# EAGLE board hexapodu (EAGLE 4.11)
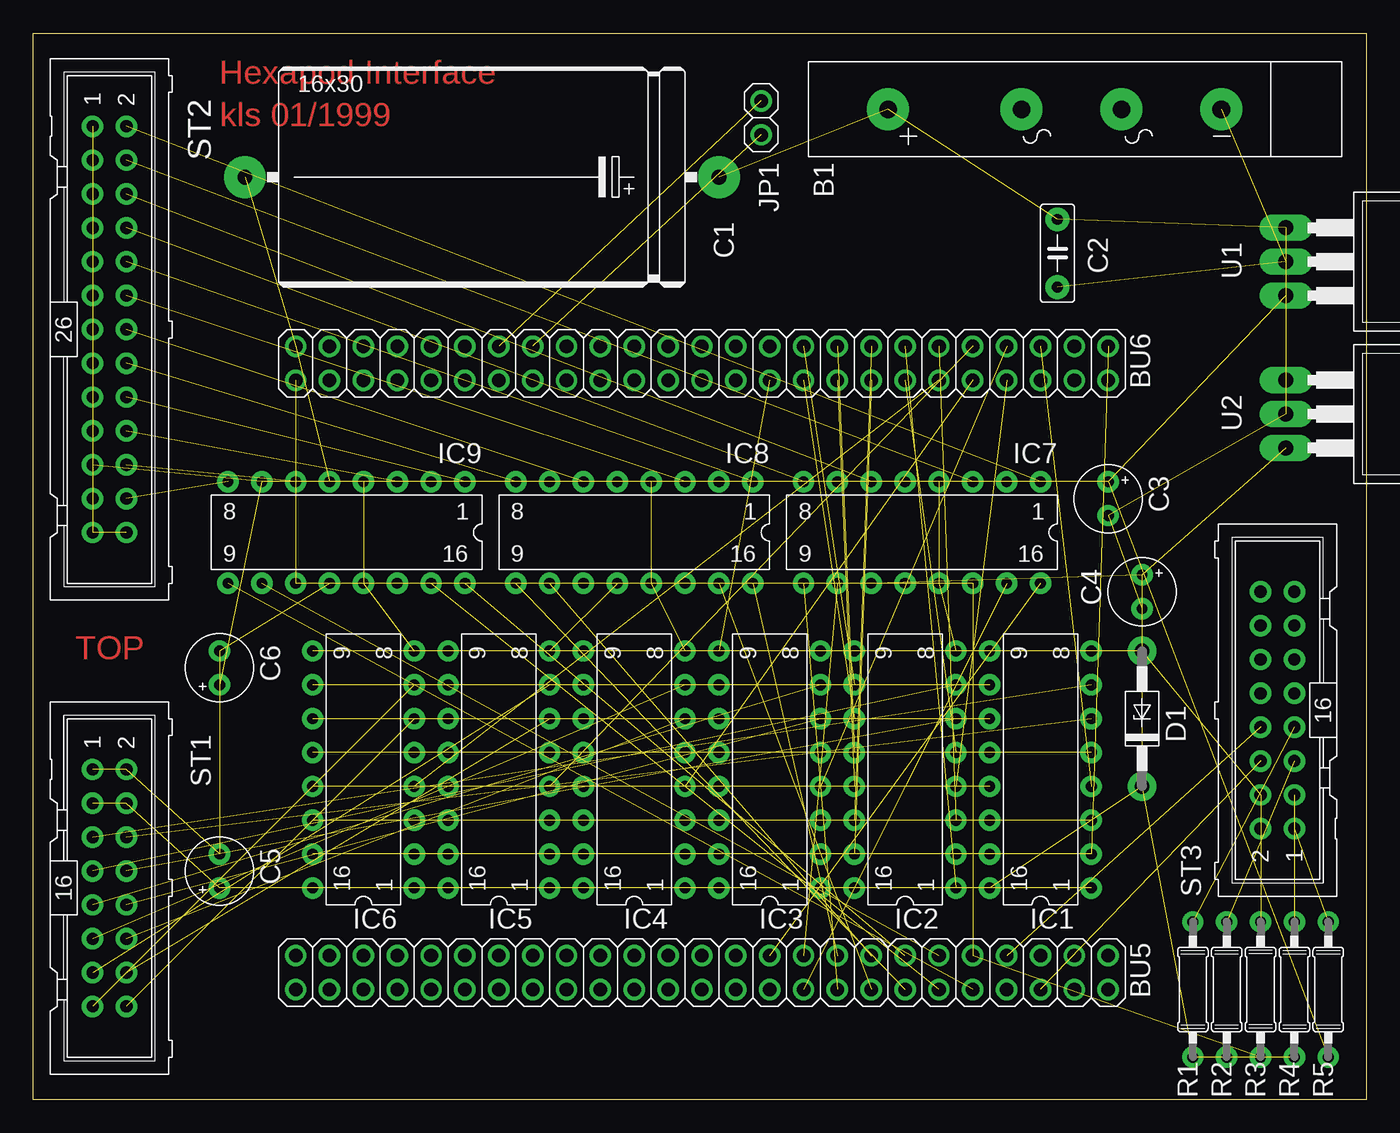
[diagram p0: board, top side]
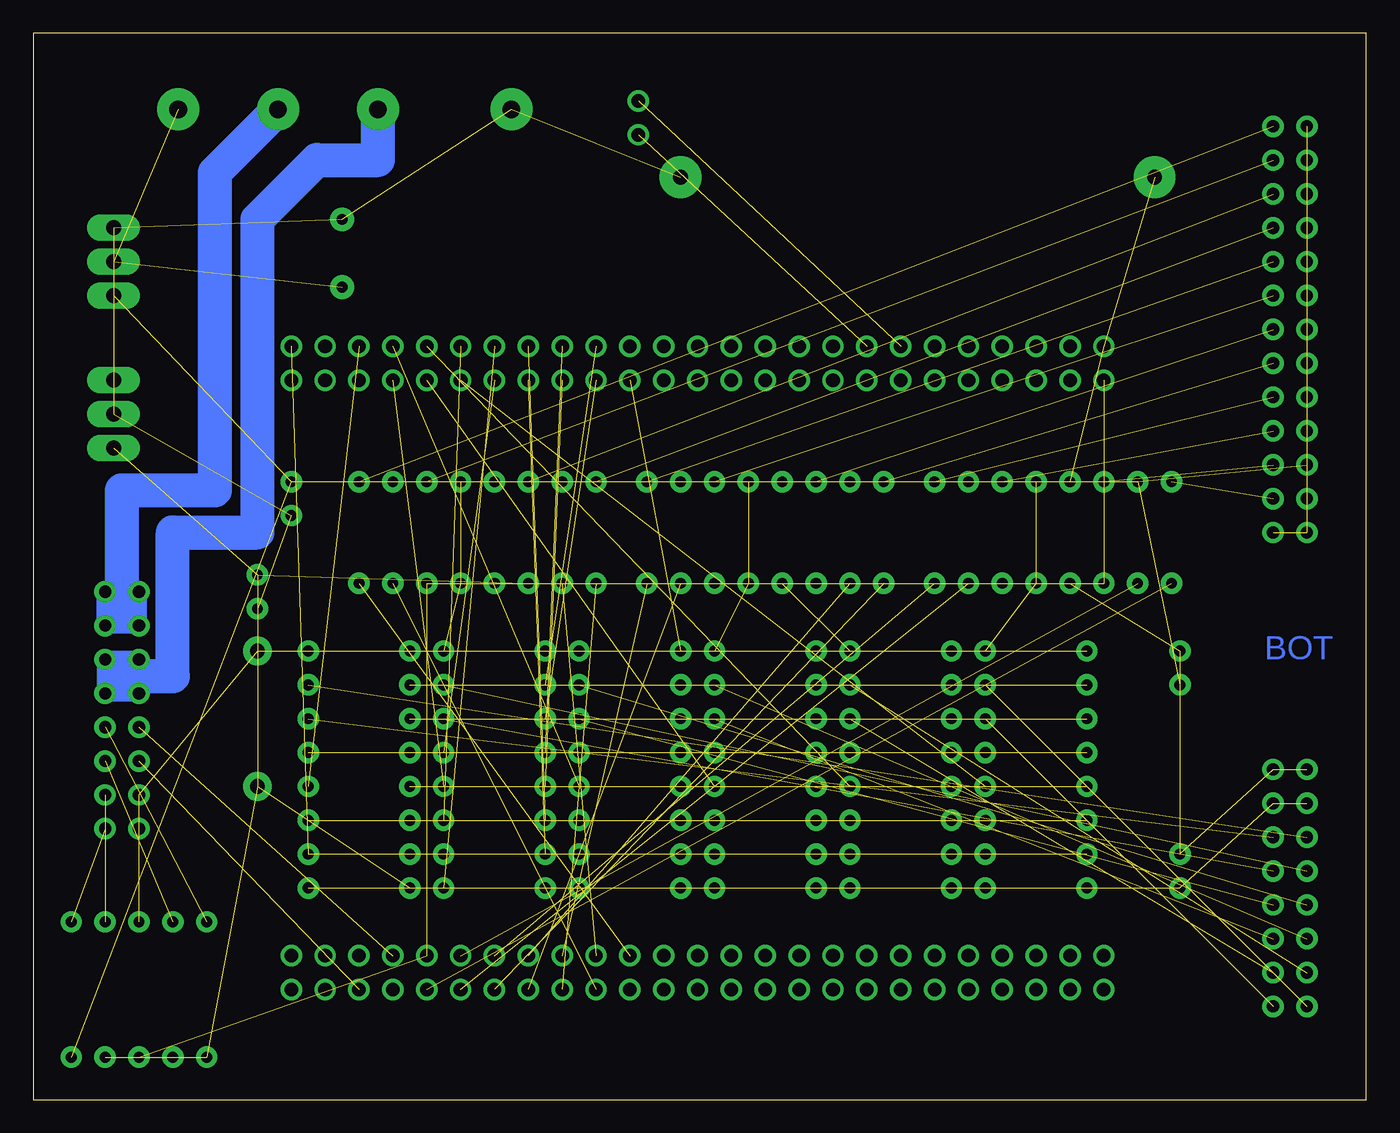
[diagram p1: board, bottom side, seen from below]

Size 100 x 80 mm. Coordinates in mm from the lower left corner, seen from the top.
Outline: 0,0 0,80 100,80 100,0 0,0
Copper layers (1*16): Top 0.035mm / dielectric 1.5mm / Bottom 0.035mm
Design rules "default": minimum track width 10mil, minimum drill 24mil, track to track 8mil, track to pad 8mil, pad to pad 8mil, via to via 8mil, smd to smd 8mil, copper to edge 40mil, drill to drill 8mil, minimum pad ring 10mil, minimum via ring 10mil, stop-mask expansion 0mil, vias tented up to drill 0mil, thermal gap 10mil
Net classes: 1 AC: width 1.27 mm, drill 0.406 mm; 2 Power: width 0.762 mm, drill 0.254 mm, clearance 0.813 mm
tRestrict: area 13.3,72.4 to 41.3,78.7

## Footprints (pad centres in the part's own frame; a part is rotated, then mirrored left to right if it is on the bottom)
FB100 = drill 1.321 pad 3.15 round: + 0,0; - 24.994,0; AC1 10.008,0; AC2 17.501,0
2X25 = drill 1.016 pad 1.6 round: 1 -30.48,-1.27; 2 -30.48,1.27; 3 -27.94,-1.27; 4 -27.94,1.27; 5 -25.4,-1.27; 6 -25.4,1.27; 7 -22.86,-1.27; 8 -22.86,1.27; 9 -20.32,-1.27; 10 -20.32,1.27; 11 -17.78,-1.27; 12 -17.78,1.27; 13 -15.24,-1.27; 14 -15.24,1.27; 15 -12.7,-1.27; 16 -12.7,1.27; 17 -10.16,-1.27; 18 -10.16,1.27; 19 -7.62,-1.27; 20 -7.62,1.27; 21 -5.08,-1.27; 22 -5.08,1.27; 23 -2.54,-1.27; 24 -2.54,1.27; 25 0,-1.27; 26 0,1.27; 27 2.54,-1.27; 28 2.54,1.27; 29 5.08,-1.27; 30 5.08,1.27; 31 7.62,-1.27; 32 7.62,1.27; 33 10.16,-1.27; 34 10.16,1.27; 35 12.7,-1.27; 36 12.7,1.27; 37 15.24,-1.27; 38 15.24,1.27; 39 17.78,-1.27; 40 17.78,1.27; 41 20.32,-1.27; 42 20.32,1.27; 43 22.86,-1.27; 44 22.86,1.27; 45 25.4,-1.27; 46 25.4,1.27; 47 27.94,-1.27; 48 27.94,1.27; 49 30.48,-1.27; 50 30.48,1.27
E35-16 = drill 1.118 pad 3.15 round: + -17.78,0; - 17.78,0
C5B2,5A = drill 0.813 pad 1.778 round: 1 -2.54,0; 2 2.54,0
E2,5-5 = drill 0.813 pad 1.6 round: + -1.27,0; - 1.27,0
DO41Z10 = drill 1.118 pad 2.159 round: A 5.08,0; K -5.08,0
DIL-16 = drill 0.813 pad 1.6 round: 1 -8.89,-3.81; 2 -6.35,-3.81; 3 -3.81,-3.81; 4 -1.27,-3.81; 5 1.27,-3.81; 6 3.81,-3.81; 7 6.35,-3.81; 8 8.89,-3.81; 9 8.89,3.81; 10 6.35,3.81; 11 3.81,3.81; 12 1.27,3.81; 13 -1.27,3.81; 14 -3.81,3.81; 15 -6.35,3.81; 16 -8.89,3.81
1X02 = drill 1.016 pad 1.6 round: 1 -1.27,0; 2 1.27,0
0207/10 = drill 0.813 pad 1.6 round: 1 -5.08,0; 2 5.08,0
0207/10@1 = drill 0.813 pad 1.6 round: 1 -5.08,0; 2 5.08,0
ML16 = drill 0.914 pad 1.6 round: 1 -8.89,-1.27; 2 -8.89,1.27; 3 -6.35,-1.27; 4 -6.35,1.27; 5 -3.81,-1.27; 6 -3.81,1.27; 7 -1.27,-1.27; 8 -1.27,1.27; 9 1.27,-1.27; 10 1.27,1.27; 11 3.81,-1.27; 12 3.81,1.27; 13 6.35,-1.27; 14 6.35,1.27; 15 8.89,-1.27; 16 8.89,1.27
ML26 = drill 0.914 pad 1.6 round: 1 -15.24,-1.27; 2 -15.24,1.27; 3 -12.7,-1.27; 4 -12.7,1.27; 5 -10.16,-1.27; 6 -10.16,1.27; 7 -7.62,-1.27; 8 -7.62,1.27; 9 -5.08,-1.27; 10 -5.08,1.27; 11 -2.54,-1.27; 12 -2.54,1.27; 13 0,-1.27; 14 0,1.27; 15 2.54,-1.27; 16 2.54,1.27; 17 5.08,-1.27; 18 5.08,1.27; 19 7.62,-1.27; 20 7.62,1.27; 21 10.16,-1.27; 22 10.16,1.27; 23 12.7,-1.27; 24 12.7,1.27; 25 15.24,-1.27; 26 15.24,1.27
TO220H = drill 1.118 pad 2 long: 1 -2.54,-6.35; 2 0,-6.35; 3 2.54,-6.35 | hole 3.302: 0,11.176

## Placement (x,y rotation side)
B1  FB100  [FB100]  64.14,74.3 0 top
BU5  PINHD-2X25  [2X25]  50.16,9.53 180 top
BU6  PINHD-2X25  [2X25]  50.16,55.24 180 top
C1  2200uF/35V  [E35-16]  33.66,69.22 180 top
C2  100nf  [C5B2,5A]  76.83,63.5 90 top
C3  4,7uf/35V  [E2,5-5]  80.64,45.09 270 top
C4  4,7uf/10V  [E2,5-5]  83.19,38.1 270 top
C5  4,7uf/10V  [E2,5-5]  13.97,17.14 90 top
C6  4,7uf/35V  [E2,5-5]  13.97,32.38 90 top
D1  BZX85  [DO41Z10]  83.19,28.57 90 top
IC1  HCTL2016  [DIL-16]  75.56,24.77 90 top
IC2  HCTL2016  [DIL-16]  65.41,24.77 90 top
IC3  HCTL2016  [DIL-16]  55.24,24.77 90 top
IC4  HCTL2016  [DIL-16]  45.09,24.77 90 top
IC5  HCTL2016  [DIL-16]  34.92,24.77 90 top
IC6  HCTL2016  [DIL-16]  24.77,24.77 90 top
IC7  DS3668  [DIL-16]  66.67,42.55 180 top
IC8  DS3668  [DIL-16]  45.09,42.55 180 top
IC9  DS3668  [DIL-16]  23.5,42.55 180 top
JP1  PINHD-1X2  [1X02]  54.61,73.66 270 top
R1  0207/10  [0207/10]  87,8.26 90 top
R2  0207/10  [0207/10]  89.53,8.26 90 top
R3  10k  [0207/10@1]  92.08,8.26 270 top
R4  0207/10  [0207/10]  94.61,8.26 90 top
R5  0207/10  [0207/10]  97.16,8.26 90 top
ST1  PINHD-2X8  [ML16]  5.71,15.88 270 top
ST2  PINHD-2X13  [ML26]  5.71,57.78 270 top
ST3  PINHD-2X8  [ML16]  93.34,29.21 90 top
U1  78S24  [TO220H]  100.33,62.87 270 top
U2  7805  [TO220H]  100.33,51.44 270 top

## Library data of the parts
B1 = RECTIF
BU5 BU6 JP1 = PINHEAD
C1 C3-C6 = ELKO
C2 = CAP-WI
D1 = diode
IC1-IC9 = klaus
R1-R5 = R
ST1-ST3 = ST-ML
U1 U2 = LINEAR

## Nets
+5V: BU6.50 C4.+ C5.+ D1.K IC1.16 IC2.16 IC3.16 IC4.16 IC5.16 IC6.16 IC7.11 IC8.11 IC9.11 R1.1 R2.1 R4.1 ST1.3 ST1.4 U2.3
+24V [Power]: C3.+ C6.+ IC7.2 IC7.7 IC8.2 IC8.7 IC9.2 IC9.7 R5.1 ST2.1 ST2.3 ST2.5 ST2.7 ST2.9 ST2.11 ST2.13 ST2.15 ST2.17 ST2.19 ST2.21 ST2.23 ST2.25 ST2.26 U1.3
AC1 [AC]: B1.AC1 ST3.9 ST3.10 ST3.11 ST3.12
AC2 [AC]: B1.AC2 ST3.13 ST3.14 ST3.15 ST3.16
CLK: BU6.1 IC1.2 IC2.2 IC3.2 IC4.2 IC5.2 IC6.2
COIL0: IC7.1 ST2.2
COIL1: IC7.3 ST2.4
COIL2: IC7.6 ST2.6
COIL3: IC7.8 ST2.8
COIL4: IC8.1 ST2.10
COIL5: IC8.3 ST2.12
COIL6: IC8.6 ST2.14
COIL7: IC8.8 ST2.16
COIL8: IC9.1 ST2.18
COIL9: IC9.3 ST2.20
COIL10: IC9.6 ST2.22
COIL11: IC9.8 ST2.24
D0: BU6.13 IC1.1 IC2.1 IC3.1 IC4.1 IC5.1 IC6.1
D1: BU6.16 IC1.15 IC2.15 IC3.15 IC4.15 IC5.15 IC6.15
D2: BU6.15 IC1.14 IC2.14 IC3.14 IC4.14 IC5.14 IC6.14
D3: BU6.18 IC1.13 IC2.13 IC3.13 IC4.13 IC5.13 IC6.13
D4: BU6.17 IC1.12 IC2.12 IC3.12 IC4.12 IC5.12 IC6.12
D5: BU6.20 IC1.11 IC2.11 IC3.11 IC4.11 IC5.11 IC6.11
D6: BU6.19 IC1.10 IC2.10 IC3.10 IC4.10 IC5.10 IC6.10
D7: BU6.22 IC1.9 IC2.9 IC3.9 IC4.9 IC5.9 IC6.9
EN: BU5.9 IC7.14 IC8.14 IC9.14 R3.2
ENC0: IC1.7 ST1.5
ENC1: IC1.6 ST1.6
ENC2: IC2.7 ST1.7
ENC3: IC2.6 ST1.8
ENC4: IC3.7 ST1.9
ENC5: IC3.6 ST1.10
ENC6: IC4.7 ST1.11
ENC7: IC4.6 ST1.12
ENC8: IC5.7 ST1.13
ENC9: IC5.6 ST1.14
ENC10: IC6.7 ST1.15
ENC11: IC6.6 ST1.16
GND [Power]: B1.- BU6.49 C1.- C2.1 C3.- C4.- C5.- C6.- D1.A IC1.8 IC2.8 IC3.8 IC4.8 IC5.8 IC6.8 IC7.4 IC7.5 IC7.12 IC7.13 IC8.4 IC8.5 IC8.12 IC8.13 IC9.4 IC9.5 IC9.12 IC9.13 R3.1 ST1.1 ST1.2 ST3.2 ST3.4 U1.2 U2.2
N$4: R5.2 ST3.1
N$5: R4.2 ST3.3
N$6: R2.2 ST3.5
N$7: R1.2 ST3.7
N$8: BU6.35 JP1.2
N$9: BU6.37 JP1.1
OE\0: BU6.5 IC1.4
OE\1: BU6.8 IC2.4
OE\2: BU6.7 IC3.4
OE\3: BU6.10 IC4.4
OE\4: BU6.9 IC5.4
OE\5: BU6.12 IC6.4
RST\: BU6.14 IC1.5 IC2.5 IC3.5 IC4.5 IC5.5 IC6.5
SEL: BU6.11 IC1.3 IC2.3 IC3.3 IC4.3 IC5.3 IC6.3
STATUS0: BU5.7 ST3.8
STATUS1: BU5.6 ST3.6
VALVE0: BU5.21 IC7.16
VALVE1: BU5.20 IC7.15
VALVE2: BU5.19 IC7.10
VALVE3: BU5.18 IC7.9
VALVE4: BU5.17 IC8.16
VALVE5: BU5.16 IC8.15
VALVE6: BU5.15 IC8.10
VALVE7: BU5.14 IC8.9
VALVE8: BU5.13 IC9.16
VALVE9: BU5.12 IC9.15
VALVE10: BU5.11 IC9.10
VALVE11: BU5.10 IC9.9
VIN [Power]: B1.+ C1.+ C2.2 U1.1 U2.1

## Tracks (layer width: path | path; a pad name or v marks a point on that pad's centre or on a via)
+5V  (18 unrouted)
+24V  (23 unrouted)
AC1
  Bottom 1.27: ST3.10 ST3.9 ST3.11 ST3.12 92.08,31.75 ST3.10
  Bottom 1.524: ST3.10 ST3.11 | ST3.12 ST3.9
  Bottom 2.54: B1.AC1 74.14,70.48 78.74,70.48 83.19,66.04 83.19,42.55 89.53,42.55 89.53,31.75 92.08,31.75
AC2
  Bottom 1.27: ST3.14 ST3.13 ST3.15 93.34,38.1 ST3.16 ST3.14
  Bottom 1.524: ST3.14 ST3.15 | ST3.13 ST3.16
  Bottom 2.54: 93.34,38.1 93.34,45.72 86.36,45.72 86.36,69.57 B1.AC2
CLK  (6 unrouted)
COIL0  (1 unrouted)
COIL1  (1 unrouted)
COIL2  (1 unrouted)
COIL3  (1 unrouted)
COIL4  (1 unrouted)
COIL5  (1 unrouted)
COIL6  (1 unrouted)
COIL7  (1 unrouted)
COIL8  (1 unrouted)
COIL9  (1 unrouted)
COIL10  (1 unrouted)
COIL11  (1 unrouted)
D0  (6 unrouted)
D1  (6 unrouted)
D2  (6 unrouted)
D3  (6 unrouted)
D4  (6 unrouted)
D5  (6 unrouted)
D6  (6 unrouted)
D7  (6 unrouted)
EN  (4 unrouted)
ENC0  (1 unrouted)
ENC1  (1 unrouted)
ENC2  (1 unrouted)
ENC3  (1 unrouted)
ENC4  (1 unrouted)
ENC5  (1 unrouted)
ENC6  (1 unrouted)
ENC7  (1 unrouted)
ENC8  (1 unrouted)
ENC9  (1 unrouted)
ENC10  (1 unrouted)
ENC11  (1 unrouted)
GND  (33 unrouted)
N$4  (1 unrouted)
N$5  (1 unrouted)
N$6  (1 unrouted)
N$7  (1 unrouted)
N$8  (1 unrouted)
N$9  (1 unrouted)
OE\0  (1 unrouted)
OE\1  (1 unrouted)
OE\2  (1 unrouted)
OE\3  (1 unrouted)
OE\4  (1 unrouted)
OE\5  (1 unrouted)
RST\  (6 unrouted)
SEL  (6 unrouted)
STATUS0  (1 unrouted)
STATUS1  (1 unrouted)
VALVE0  (1 unrouted)
VALVE1  (1 unrouted)
VALVE2  (1 unrouted)
VALVE3  (1 unrouted)
VALVE4  (1 unrouted)
VALVE5  (1 unrouted)
VALVE6  (1 unrouted)
VALVE7  (1 unrouted)
VALVE8  (1 unrouted)
VALVE9  (1 unrouted)
VALVE10  (1 unrouted)
VALVE11  (1 unrouted)
VIN  (4 unrouted)

## Text on the board
Top: Hexapod Interface | kls 01/1999 | TOP
Bottom: BOT